# Altium PCB IR LED.PcbDoc
Units mil, origin at the board's own origin, x right, y up, seen from the top; angles counter-clockwise.
Board outline 1200.79 x 877.95 mil, 2 copper layers (Top Layer, Bottom Layer); 10 components, 9 nets, 27 pads, 21 vias.
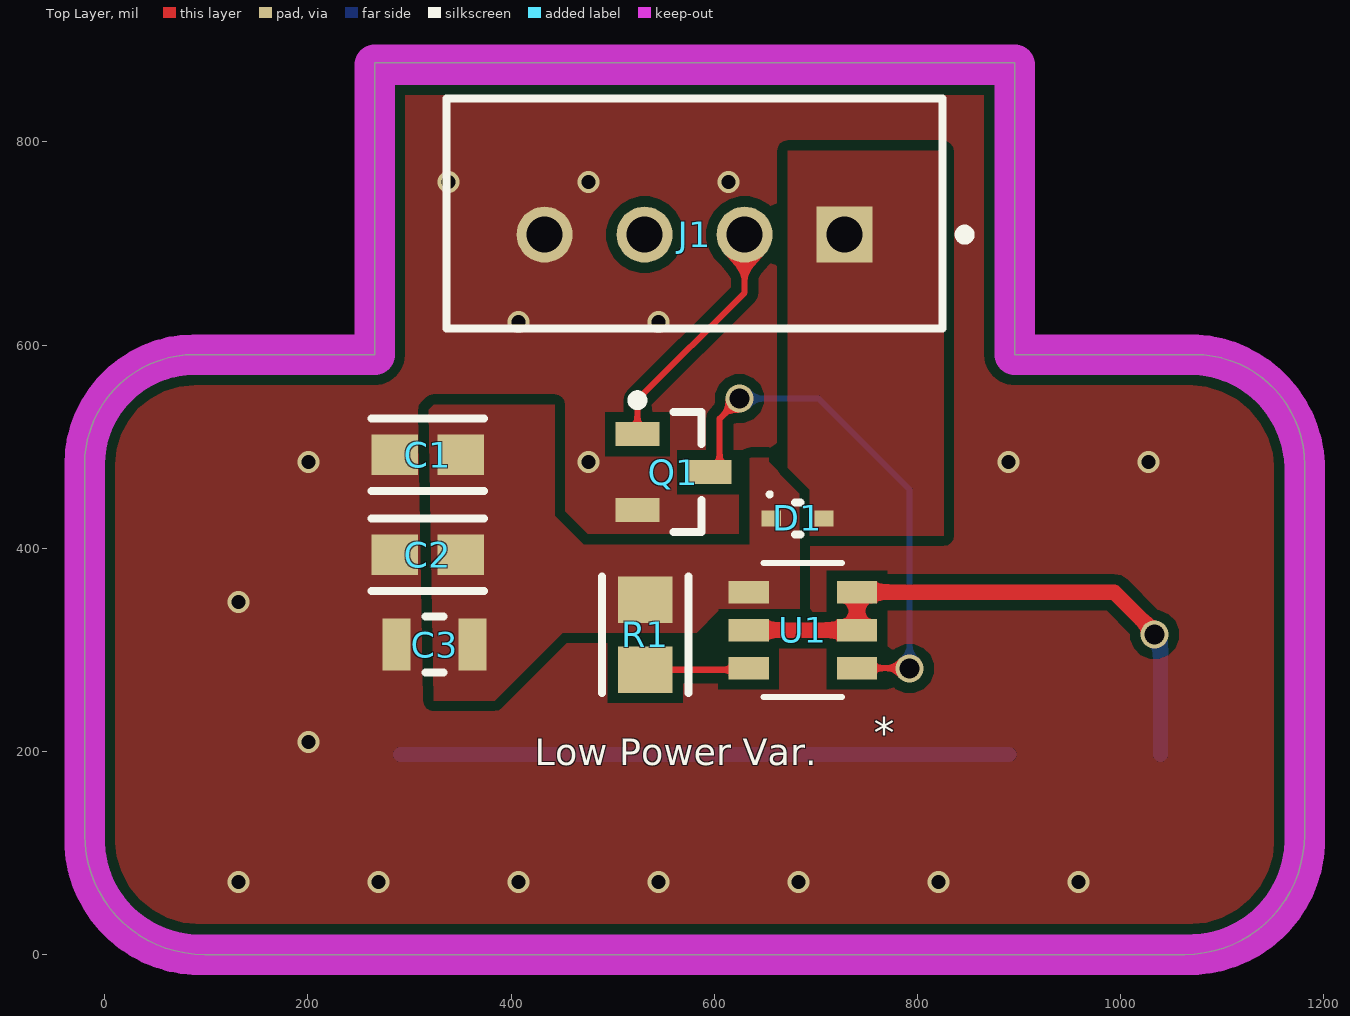
[diagram p0: Top Layer view]
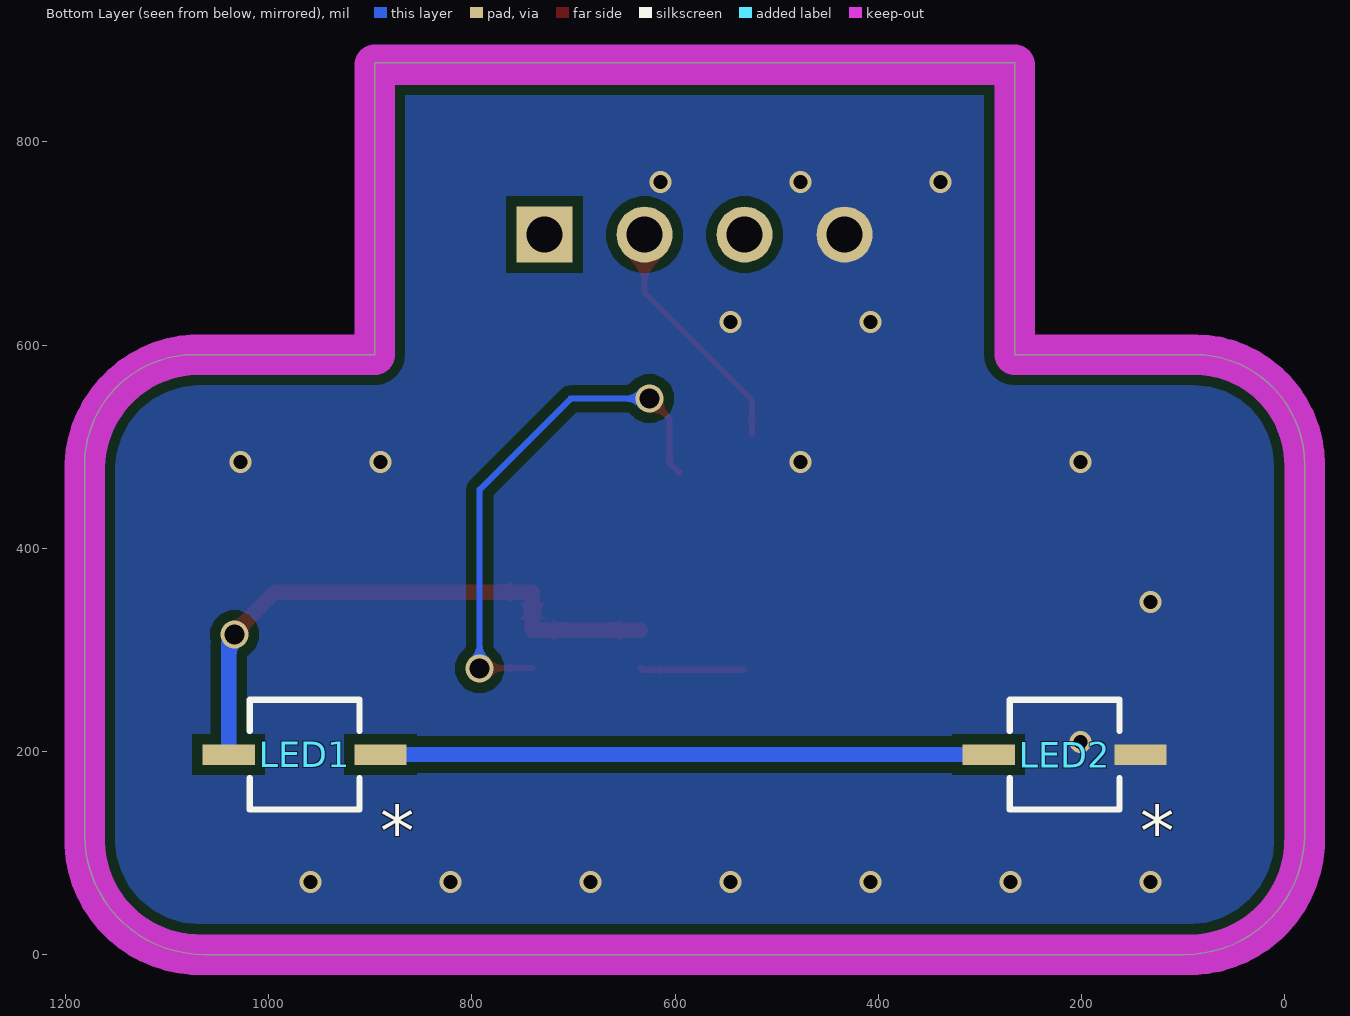
[diagram p1: Bottom Layer view, seen from below]
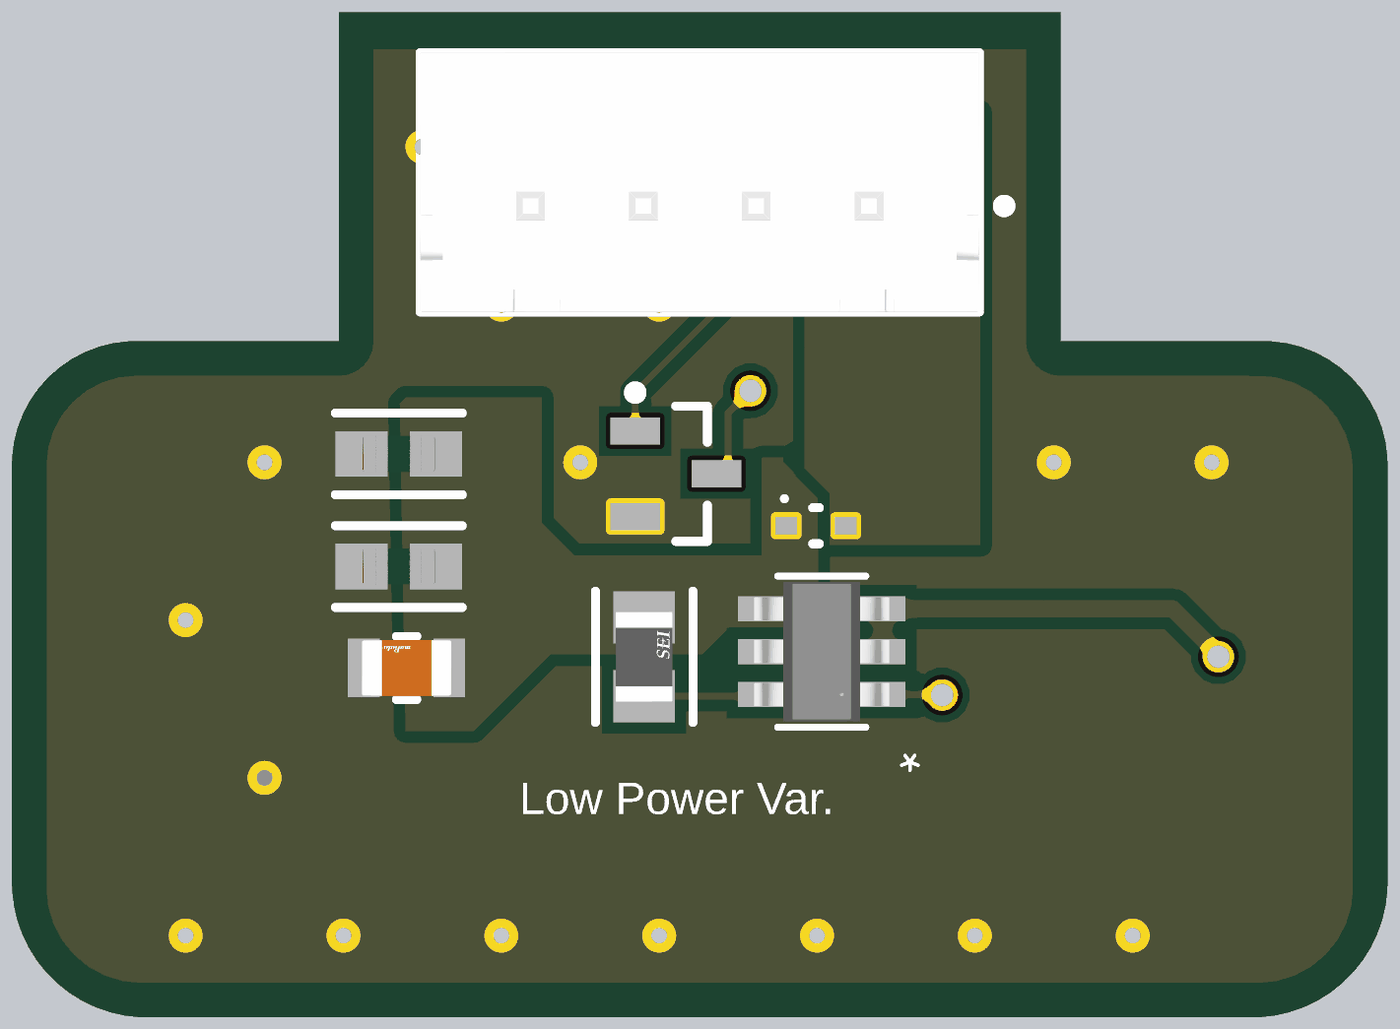
[diagram p2: 3D render of the assembled board from above, using the file's embedded part models]

## Layer stack, top to bottom
Top Solder: solder mask 0.4, Solder Resist, Dk 3.5
Top Layer: signal copper 1.4
Dielectric 1: dielectric 12.6, FR-4, Dk 4.8
Bottom Layer: signal copper 1.4
Bottom Solder: solder mask 0.4, Solder Resist, Dk 3.5

## Board outline
-19.69,118.11 -19.69,482.28 cw(c88.58,482.28) 88.58,590.55 265.75,590.55 265.75,877.95 895.67,877.95 895.67,590.55 1072.83,590.55 cw(c1072.83,482.28) 1181.1,482.28 1181.1,118.11 cw(c1062.99,118.11) 1062.99,0 98.43,0 cw(c98.43,118.11)

## Design rules (kind name [scope] priority, off if disabled: settings)
Clearance [All] p1: gap=10 ignorepadtopadclearanceinfootprint=FALSE
PolygonConnect [All] p1: connectstyle=Direct reliefconductorwidth=10 reliefentries=4 polygonreliefangle="90 Angle" airgapwidth=10
RoutingVias [All] p1: holewidth=28 width=50 viastyle="Through Hole" minholewidth=28 minwidth=50 maxholewidth=28 maxwidth=50
SolderMaskExpansion [All] p1: expansion=4 istentingtop=FALSE
SupplyNets "Schematic Supply Nets_2" [InNet('VS LED')] p1: voltage=0.000
SupplyNets "Schematic Supply Nets_1" [InNet('GND')] p2: voltage=0.000
SupplyNets "Schematic Supply Nets" [InNet('LED Power')] p3: voltage=0.000
Width Power [(InNet('LED Power') OR InNet('VS LED') OR InNet('NetLED1_1') OR InNet('NetLED1_2'))] p1: maxlimit=20 minlimit=15 preferedwidth=20
Width [All] p2: maxlimit=6 minlimit=5 preferedwidth=6
30 further rules are at their usual default settings.

## Classes and differential pairs
component class "IR LED": C1 C2 C3 D1 J1 LED1 LED2 Q1

## Components (designator, comment, footprint, x,y, rotation, side; value= is the part's Value field where it differs from the comment)
C1 "100nF" FP-CL10-IPC_A 317.99,492.13 r180 top
C2 "100nF" FP-CL10-IPC_A 317.99,393.7 r180 top
C3 "1uF" FP-GCM21B-0_15-MFG 324.8,305.12 r180 top
D1 "RB520S30T5G" ONSC-SOD-523-2-502-01_V 682.2,429.37 r0 top
J1 "B4B-XH-A(LF)(SN)" FP-B4B-XH-A_LF_SN-MFG 580.71,729.33 r0 top
LED1 "VSMY2940GX01" DIODE_VSMY2940GX01_VIS 964.57,196.85 r0 bottom
LED2 "VSMY2940GX01" DIODE_VSMY2940GX01_VIS 216.54,196.85 r0 bottom
Q1 "2N7002P,215" NXP-SOT23_L 559.8,474.8 r0 top
R1 "10R" FP-RMCF0805-IPC_B 532.2,314.89 r90 top
U1 "BCR402UW6Q-7" BCR402UW6Q-7_DIO 687.2,319.37 r180 top

## Footprints (in the part's own frame and the unit in brackets; to place one, negate y for a bottom-side part, rotate by r counter-clockwise, add the part's x,y. Pads: shape width x height; smd on the part's side, far side on the other; paste and mask are expansions set on the pad)
BCR402UW6Q-7_DIO [mil]
  rect 39.5x22 smd paste+0 mask+0: 1(-53.25,37.4) 2(-53.25,0) 3(-53.25,-37.4) 4(53.25,-37.4) 5(53.25,0) 6(53.25,37.4)
  silkscreen extent -39,-66 39,66, body extent -59,-61 59,61, height 55
DIODE_VSMY2940GX01_VIS [mil]
  rect 51.5x20 smd paste+0 mask+0: 1(-74.75,0) 2(74.75,0)
  silkscreen extent -54,-54 54,54, body extent -86,-49 86,49, height 117
FP-B4B-XH-A_LF_SN-MFG [mm]
  rect 1.4x1.4 hole 0.9 paste-2539.97 mask+0: 1(3.75,-0.525)
  round 1.4 hole 0.9 paste-2539.97 mask+0: 2(1.25,-0.525) 3(-1.25,-0.525) 4(-3.75,-0.525)
  silkscreen extent -6.2,-2.88 6.88,2.88, body extent -6.3,-2.98 6.3,2.98, height 0.25
FP-CL10-IPC_A [mil]
  rect 45.6x39.85 smd paste+0 mask+0: 1(-32.56,0) 2(32.56,0)
  silkscreen extent -55,-36 55,36, body extent -75,-40 75,40, height 10
FP-GCM21B-0_15-MFG [mm]
  rect 0.7x1.3 smd paste+0 mask+0: 1(-0.95,0) 2(0.95,0)
  silkscreen extent -0.23,-0.7 0.23,0.7, body extent -1.4,-0.8 1.4,0.8, height 0.25
FP-RMCF0805-IPC_B [mil]
  rect 45.46x53.63 smd paste+0 mask+0: 1(-34.48,0) 2(34.48,0)
  silkscreen extent -57,-43 57,43, body extent -67,-37 67,37, height 10
NXP-SOT23_L [mm] "SOT23, 3-Leads, Body 3x1.4mm, Pitch 0.95mm, IPC High Density"
  rect 1.1x0.6 smd: 1(-0.9,0.95) 2(-0.9,-0.95) 3(0.9,0)
  silkscreen extent -1.02,-1.5 0.7,1.92, body extent -0.7,-1.5 0.7,1.5, height 1.1
ONSC-SOD-523-2-502-01_V [mm] "SOD, 2-Leads, Body 1.2x0.8mm"
  rect 0.48x0.4 smd: 1(-0.66,0) 2(0.66,0)
  silkscreen extent -0.75,-0.4 0.07,0.65, body extent -0.6,-0.4 0.6,0.4, height 0.7

## Part data
C1 C2: library part CMP-13271-003556-1, "Cap Ceramic 100nF 25V X7R ±10% Pad SMD 0603 +125°C T/R CL10B104KA8WPNC", Case Code (Imperial)=0603, Case Code (Metric)=1608, Max Operating Temperature=125°C, Min Operating Temperature=-55°C, Ratings=AEC-Q200, Tolerance=10%, Voltage Rating=25V, Capacitance=100nF, Case/Package=0603, Features="Soft Termination", Length=0.063inch, Mount="Surface Mount", Packaging="Tape and Reel", Thickness=0.035inch, Width=0.031inch
C3: library part CMP-06035-008660-1, "Ceramic Capacitor for Automotive 1uF ±20% 50VDC X7R 0805 Embossed T/R GCM21BR71H105MA03L"
D1: library part CMP-1055-00481-1, "Schottky Barrier Diode, 2-Pin SOD-523, Pb-Free, Tape and Reel", Manufacturer="On Semiconductor", ComponentLink1Description="Manufacturer URL", ComponentLink1URL=http://www.onsemi.com/, ComponentLink2Description=Datasheet, ComponentLink2URL=http://www.onsemi.cn/pub_link/Collateral/RB520S30T1-D.PDF, ComponentLink3Description="Package Specification", ComponentLink3URL=http://www.onsemi.com/pub_link/Collateral/502-01.PDF, Configuration=Single, DatasheetVersion="Rev. 10", Mounting Technology="Surface Mount", PackageDescription="2-Pin SOD, Body 1.2 x 0.8 mm", PackageReference=SOD-523-2-502-01, PackageVersion="Rev. E, 09/2010", Packing="Tape and Reel", PartNumber=RB520S30T5G, RoHS=TRUE
J1: library part CMP-17439-000250-1, "CONN HEADER VERT 4POS 2.5MM", Color=Natural, Contact Resistance=20mR, Current Rating=3A, Flammability Rating="UL94 V-0", Housing Color=White, Insulation Resistance=1GR, Max Operating Temperature=85°C, Max Voltage Rating (AC)=250V, Min Operating Temperature=-25°C, Package Quantity=500, Connector Type=Header, Contact Finish - Mating=TIN, Contact Material=Brass, Contact Plating=Tin, Contact Shape=Square, Contact Type="Male Pin", Depth=5.75mm, Fastening Type=Detent, Gender=Male, Housing Material=Polyamide, Insulation Color=Natural, Insulation Material=Nylon, Lead Free="Lead Free", Lead Pitch=2.5mm, Length=12.4mm, Mated Stacking Heights=9.8mm, Material=Polyamide, Max Current Rating=3A, Max Voltage Rating (DC)=250V, Mount="Through Hole", Number Of Contacts=4, Number of Positions=4, Number of Rows=1, Orientation=Straight, Packaging=Bulk, Pitch=2.5mm, REACH SVHC="No SVHC", Series=XH, Termination=Solder, Voltage Rating=250V, Voltage Rating (AC)=250V, Wire/Cable Gauge=22AWG
LED1 LED2: "No Description Available", Mfr_Name=Vishay
Q1: library part CMP-1259-00082-1, "N-Channel Trench MOSFET, 60 V, 0.36 A, -55 to 150 degC, 3-Pin SOT23, Tape and Reel", Manufacturer="NXP Semiconductors", Automotive Qualified=Y, Channel Type=N, Code_JEDEC=TO-236AB, ComponentLink1Description="Manufacturer URL", ComponentLink1URL=http://www.nxp.com/, ComponentLink2Description=Datasheet, ComponentLink2URL=http://www.nxp.com/documents/data_sheet/2N7002P.pdf, ComponentLink3Description="Package Specification", ComponentLink3URL=http://www.nxp.com/documents/outline_drawing/sot023_po.pdf, DatasheetVersion="Rev. 02", ID [max] (A)=0.36, IDM [max] (A)=1.2, Mounting Technology="Surface Mount", PackageDescription="3-Pin Small Outline Transistor Package, Body 2.9 x 1.3 mm, Pitch 0.95 mm", PackageReference=SOT23, PackageVersion="06-03-16, 03/2006", Packing="Tape & Reel", PartNumber=2N7002P,215, VDS [max] (V)=60, VGSth [typ] (V)=1.75
R1: library part CMP-26527-004108-1, "10Ω ±1% 0.125W 0805 Thick Film Chip Resistor AEC-Q200 compliant RMCF0805FG10R0", Case/Package=0805, Max Operating Temperature=155°C, Max Power Dissipation=125mW, Min Operating Temperature=-55°C, Resistor Type="Thick Film", Temperature Coefficient=100ppm/°C, Tolerance=1%, Contact Plating=Tin, Features="Automotive AEC-Q200", Height=0.026inch, Length=0.079inch, Mount="Surface Mount", Number of Terminations=2, Packaging="Tape and Reel", Radiation Hardening=No, Resistance=10R, RoHS Compliant=Yes, Series=RMCF, Width=0.049inch
U1: "No Description Available", Manufacturer_Name="Diodes Inc", Copyright="Copyright (C) 2026 Ultra Librarian. All rights reserved.", Manufacturer_Part_Number=BCR402UW6Q-7, RefDes=RefDes, Type=Type

## Via types
v1: diameter 21.65, hole 13.78, Top Layer to Bottom Layer, 18 vias
v2: diameter 27.56, hole 19.68, Top Layer to Bottom Layer, 3 vias

## Nets (pads, with @x,y where several pads share a name; then routed paths per layer and width w, separated by ;. In a path a pad name is that pad's centre, name@x,y a point inside that pad or via, vN(x,y) a via of type N, cw(c..) or ccw(c..) an arc to the next point about the centre after c; other vN are vias at no path point)
GND: C1.2 C2.2 C3.2 J1.4 LED2.1 Q1.2
  other v1: 131.89,71.34 269.69,71.34 407.48,71.34 545.28,71.34 683.07,71.34 820.87,71.34 958.66,71.34 200.79,209.13 131.89,346.93 200.79,484.72 476.38,484.72 889.76,484.72 1027.56,484.72 407.48,622.52 545.28,622.52 338.58,760.32 476.38,760.32 614.17,760.32
"LED Control": J1.3
"LED Power": D1.2 J1.1
NetLED1_1: LED1.1 LED2.2 | length 598.5
  Bottom Layer w15: LED2.2 LED1.1
NetLED1_2: LED1.2 U1.2 U1.3 U1.5 | length 575.9
  Top Layer w15: U1.5 U1.2 U1.3 993.68,356.77 1033.46,316.98 v2(1033.46,314.96)
  Bottom Layer w15: v2(1033.46,314.96) 1033.46,311.56 1039.32,305.71 LED1.2
NetQ1_3: Q1.3 U1.1 | length 512.3
  Top Layer w6: Q1.3 596.5,474.8 605.31,483.61 605.31,527.56 v2(625,547.24) ; U1.1 785.91,281.97 v2@786.42,282.48
  Bottom Layer w6: v2(625,547.24) 702.76,547.24 792.32,457.68 v2(792.32,281.5)
NetR1_1: R1.1 U1.6 | length 102.4
  Top Layer w6: R1.1 632.4,280.41 U1.6
"PWM LED": J1.2 Q1.1 | length 240.2
  Top Layer w6: Q1.1 524.37,546.02 629.92,651.57 J1.2
"VS LED": C1.1 C2.1 C3.1 D1.1 R1.2 U1.4

## Polygon pours and split planes (outlines as drawn)
GND on Top Layer "GND" (solid, remove dead copper, pour order 3): 265.75,877.95 896.65,877.95 895.67,876.97 895.67,590.55 1138.78,590.55 1182.09,547.24 1181.1,546.26 1181.1,69.88 1111.22,0 55.12,0 -28.54,83.66 -26.57,85.63 -26.57,536.42 35.43,598.43 36.42,597.44 265.75,597.44
"VS LED" on Top Layer "VS LED" (solid, remove dead copper, pour order 1): 318.71,541.34 442.91,541.34 442.91,432.09 471.46,403.54 634.84,403.54 634.84,490.16 635.83,489.17 653.54,489.17 653.54,485.24 684.06,454.72 684.06,340.55 606.3,340.55 582.68,316.93 450.79,316.93 383.86,250 323.82,250
"LED Power" on Top Layer "LED Power" (solid, remove dead copper, pour order 0): 693.9,412.4 693.9,457.68 672.24,479.33 672.24,791.34 824.8,791.34 825.79,790.35 825.79,412.4
GND on Bottom Layer "GND" (solid, remove dead copper, pour order 5): 265.75,590.55 49.21,590.55 -19.69,521.65 -19.69,59.05 39.37,0 1122.05,0 1181.1,59.06 1181.1,521.65 1112.2,590.55 895.67,590.55 895.67,875.98 265.75,875.98

## Keep-outs
Keep-Out Layer:
  lines w40: -19.69,118.11 ccw(c93.5,113.19) 88.58,0 1062.99,0 ccw(c1067.91,113.19) 1181.1,108.27 1181.1,482.28 ccw(c1067.91,477.36) 1062.99,590.55 895.67,590.55 895.67,875.98 265.75,875.98 265.75,590.55 88.58,590.55 ccw(c88.58,482.28) -19.69,482.28 -19.69,118.11

## Silkscreen, mask and mechanical layers (free items; w line width, h text height)
Top Overlay:
  text "Low Power Var." at 423.23,177.62 h45
Mechanical 1:
  the board outline again, w10

## Text inside footprints (layer, text, board x,y; h text height)
LED1: Bottom 3D Body "*" at 918.07,200.85 h50 r180; Bottom Overlay "*" at 856.3,167.32 h50 r180
LED2: Bottom 3D Body "*" at 170.04,200.85 h50 r180; Bottom Overlay "*" at 108.27,167.32 h50 r180
U1: Top 3D Body "*" at 718.2,311.37 h50 r180; Top Overlay "*" at 777.56,246.06 h30 r180